# Altium PCB TypeC_2.54.PcbDoc
Units mil, origin at the board's own origin, x right, y up, seen from the top; angles counter-clockwise.
Board outline 410 x 440 mil, 2 copper layers (Top Layer, Bottom Layer); 3 components, 4 nets, 29 pads, 2 vias.
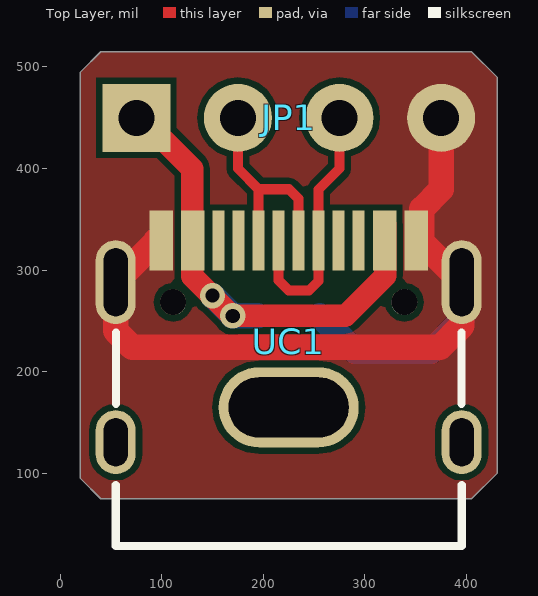
[diagram p0: Top Layer view]
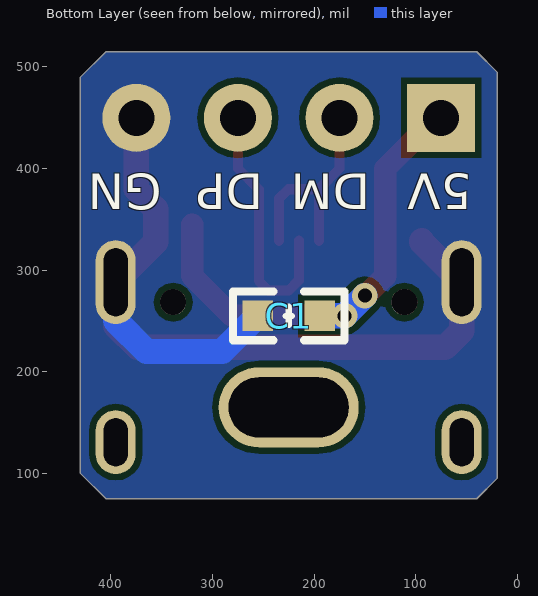
[diagram p1: Bottom Layer view, seen from below]

## Layer stack, top to bottom
Top Solder: solder mask 0.4, Solder Resist, Dk 3.5
Top Layer: signal copper 1.4
Dielectric 1: dielectric 12.6, FR-4, Dk 4.8
Bottom Layer: signal copper 1.4
Bottom Solder: solder mask 0.4, Solder Resist, Dk 3.5

## Board outline
20,95 20,495 40,515 405,515 430,490 430,100 405,75 40,75

## Design rules (kind name [scope] priority, off if disabled: settings)
Clearance [All] p1: gap=6 ignorepadtopadclearanceinfootprint=FALSE
PlaneConnect [All] p1: planeconnectstyle=Direct reliefexpansion=20 reliefentries=4 reliefconductorwidth=10 reliefairgap=10
PolygonConnect [All] p1: connectstyle=Direct reliefconductorwidth=10 reliefentries=4 polygonreliefangle="90 Angle" airgapwidth=10
RoutingVias [All] p1: holewidth=14 width=25 viastyle="Through Hole" minholewidth=12 minwidth=24 maxholewidth=28 maxwidth=50
SolderMaskExpansion [All] p1: expansion=4
Width [All] p1: maxlimit=25 minlimit=6 preferedwidth=10
29 further rules are at their usual default settings.

## Components (designator, comment, footprint, x,y, rotation, side; value= is the part's Value field where it differs from the comment)
C1 "104" "C 0603_L" 225,255 r180 bottom
JP1 "HDR-1X4" HDR2.54-LI-4P 225,450 r0 top
UC1 "TypeC" Type-C_8.64.5.82.12pin 225,225 r270 top

## Footprints (in the part's own frame and the unit in brackets; to place one, negate y for a bottom-side part, rotate by r counter-clockwise, add the part's x,y. Pads: shape width x height; smd on the part's side, far side on the other; paste and mask are expansions set on the pad)
"C 0603_L" [mil] "无极性贴片电容"
  rect 30x30 smd: 1(-30.59,0) 2(30.59,0)
  silkscreen extent -55,-24 55,24, body extent -31,-16 31,16, height 32
HDR2.54-LI-4P [mm] "排针，4脚"
  rect 1.7x1.7 hole 0.9: 1(-3.81,0)
  round 1.7 hole 0.9: 2(-1.27,0) 3(1.27,0) 4(3.81,0)
  body extent -5.08,-1.27 5.08,1.27, height 8.5
Type-C_8.64.5.82.12pin [mm]
  round 0.65 hole 0.65: 0(-1.105,2.89) 0(-1.105,-2.89)
  oval 1.6x1 hole 0.6 slot 1.2 at 0 deg: 1(2.395,4.325) 2(2.395,-4.325)
  oval 2.1x1 hole 0.6 slot 1.7 at 0 deg: 3(-1.605,-4.325) 4(-1.605,4.325)
  rect 1.5x0.3 smd: A1(-2.642,-3.327) A4(-2.642,-2.54) A5(-2.642,-1.254) A6(-2.642,-0.254) A7(-2.642,0.246) A8(-2.642,1.246) A9(-2.642,2.54) A12(-2.642,3.327) B1(-2.642,3.048) B4(-2.642,2.261) B5(-2.642,1.746) B6(-2.642,0.746) B7(-2.642,-0.754) B8(-2.642,-1.754) B9(-2.642,-2.261) B12(-2.642,-3.048)
  silkscreen extent -0.34,-4.33 4.99,4.33, body extent -2.49,-4.47 5.41,4.47, height 3.23

## Part data
C1: library part C, "无极性贴片电容"
JP1: library part "Header 4", "4P接插件", BOM名称=4P接插件, 学习资源=www.ooocke.com, 版权归属=源创客
UC1: library part USB_Type-C, "TypeC_SinglePin_Short"

## Free pads (board coordinates)
  oval 137.8x78.74 hole 59.06 slot 118.11 at 0 deg: 2(225,165)

## Via types
v1: diameter 25, hole 14, Top Layer to Bottom Layer, tented both sides, 2 vias

## Nets (pads, with @x,y where several pads share a name; then routed paths per layer and width w, separated by ;. In a path a pad name is that pad's centre, name@x,y a point inside that pad or via, vN(x,y) a via of type N, cw(c..) or ccw(c..) an arc to the next point about the centre after c; other vN are vias at no path point)
D+: JP1.3 UC1.A6 UC1.B6 | length 255.6
  Top Layer w10: UC1.A6 215,290 225,280 245,280 254.37,289.37 UC1.B6 254.37,379.37 275,400 JP1.3
D-: JP1.2 UC1.A7 UC1.B7 | length 214
  Top Layer w10: JP1.2 175,400 195.31,379.69 ; UC1.B7 195.31,379.69 ; UC1.A7 234.68,370.32 225.31,379.69 195.31,379.69
GND: C1.1 JP1.4 UC1.3 UC1.4 UC1.A1 UC1.A12 UC1.B1 UC1.B12 | length 894.6
  Top Layer w25: UC1.A1 94,327.46 UC1.3 54.72,240.28 71,224 374,224 395.28,245.28 UC1.4 356,327.46 UC1.A12 356,360.37 375,379.37 JP1.4
  Bottom Layer w25: C1.1 290.59,220 365,220 395.28,250.28 UC1.4
VIN: C1.2 JP1.1 UC1.A4 UC1.A9 UC1.B4 UC1.B9 | length 502.5
  Top Layer w22: JP1.1@80,450 130,400 130,294.06 169.06,255 280.63,255 320,294.37 UC1.A9@320,345
  Bottom Layer w25: v1(150,275) v1(170,255) C1.2
pads on no net: UC1.0 UC1.1 UC1.2 UC1.A5 UC1.A8 UC1.B5 UC1.B8

## Polygon pours and split planes (outlines as drawn)
no net on Bottom Overlay (solid): 20,495
GND on Top Layer (solid, remove dead copper, pour order 0): 20,95 40,75 405,75 430,100 430,490 405,515 40,515 20,495
GND on Bottom Layer (solid, remove dead copper, pour order 2): 20,95 40,75 405,75 430,100 430,490 405,515 40,515 20,495

## Silkscreen, mask and mechanical layers (free items; w line width, h text height)
Bottom Overlay:
  text "5V" at 45,395 h35 r180
  text "DM" at 145,395 h35 r180
  text "DP" at 250,395 h35 r180
  text "GN" at 350,395 h35 r180
Mechanical 1:
  the board outline again, w10